# EAGLE board board (EAGLE 9.2.2)
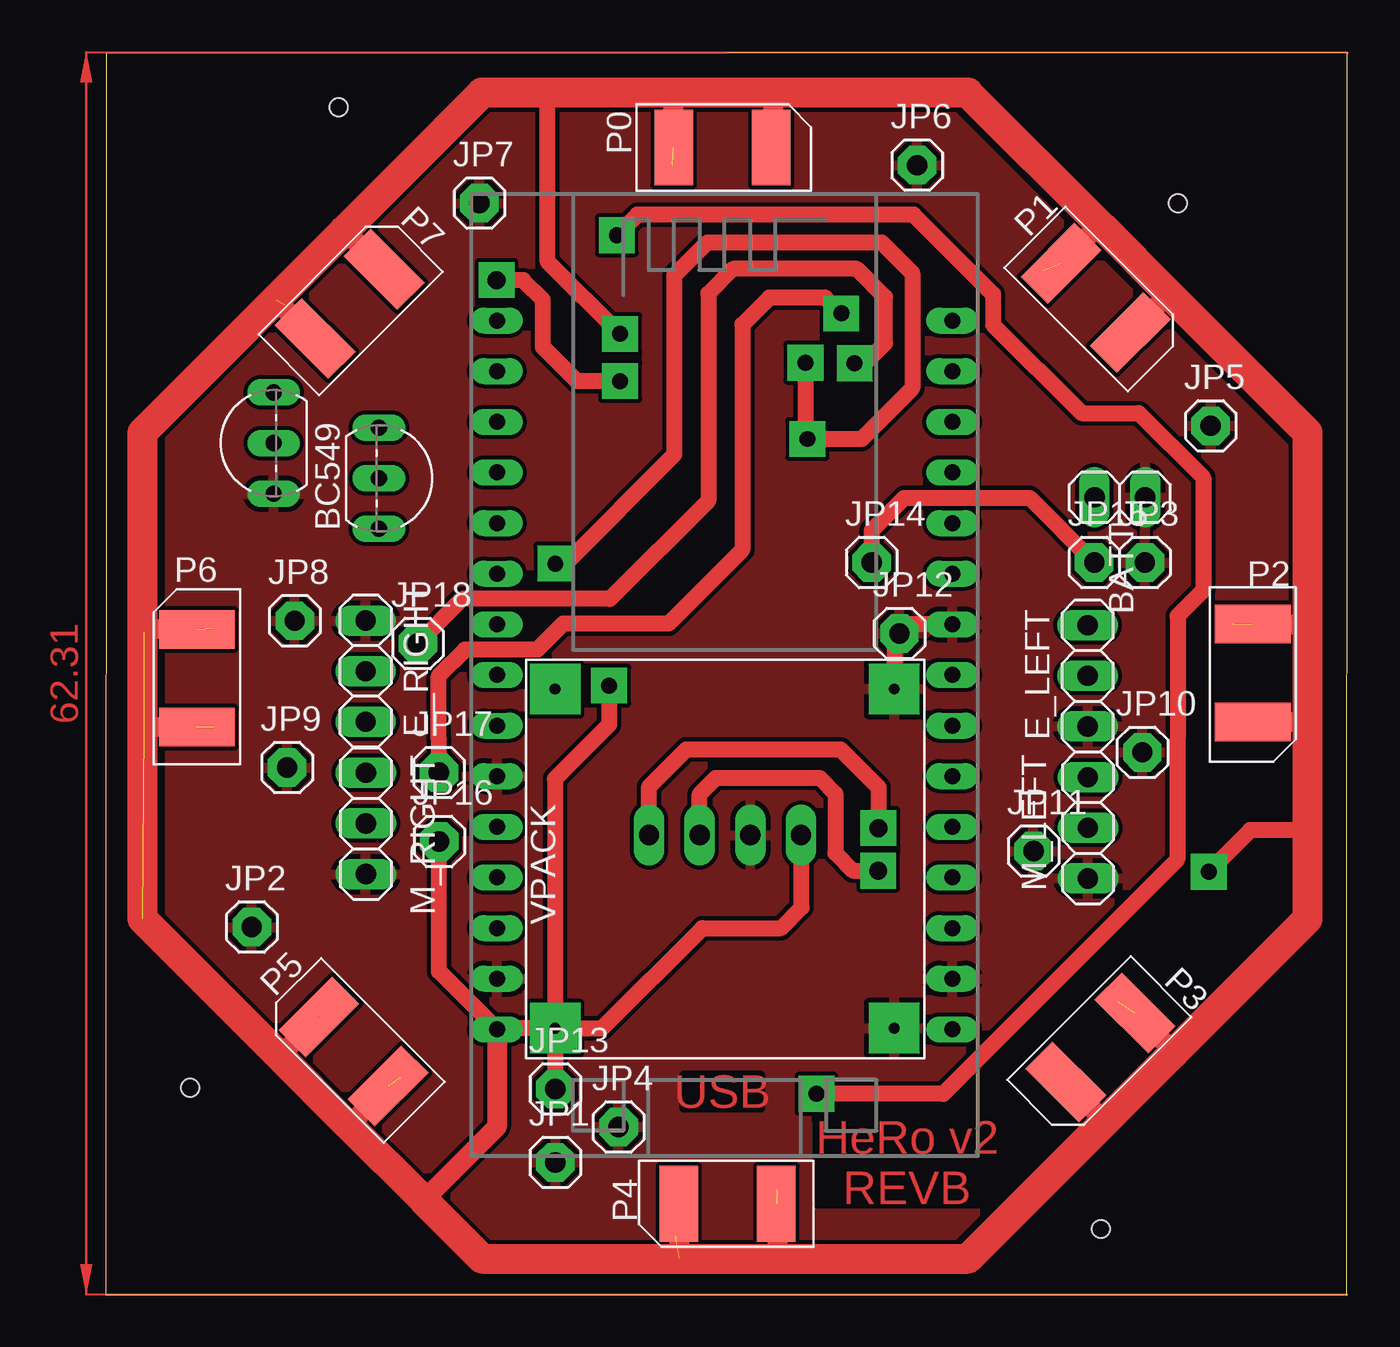
[diagram p0: board, top side]
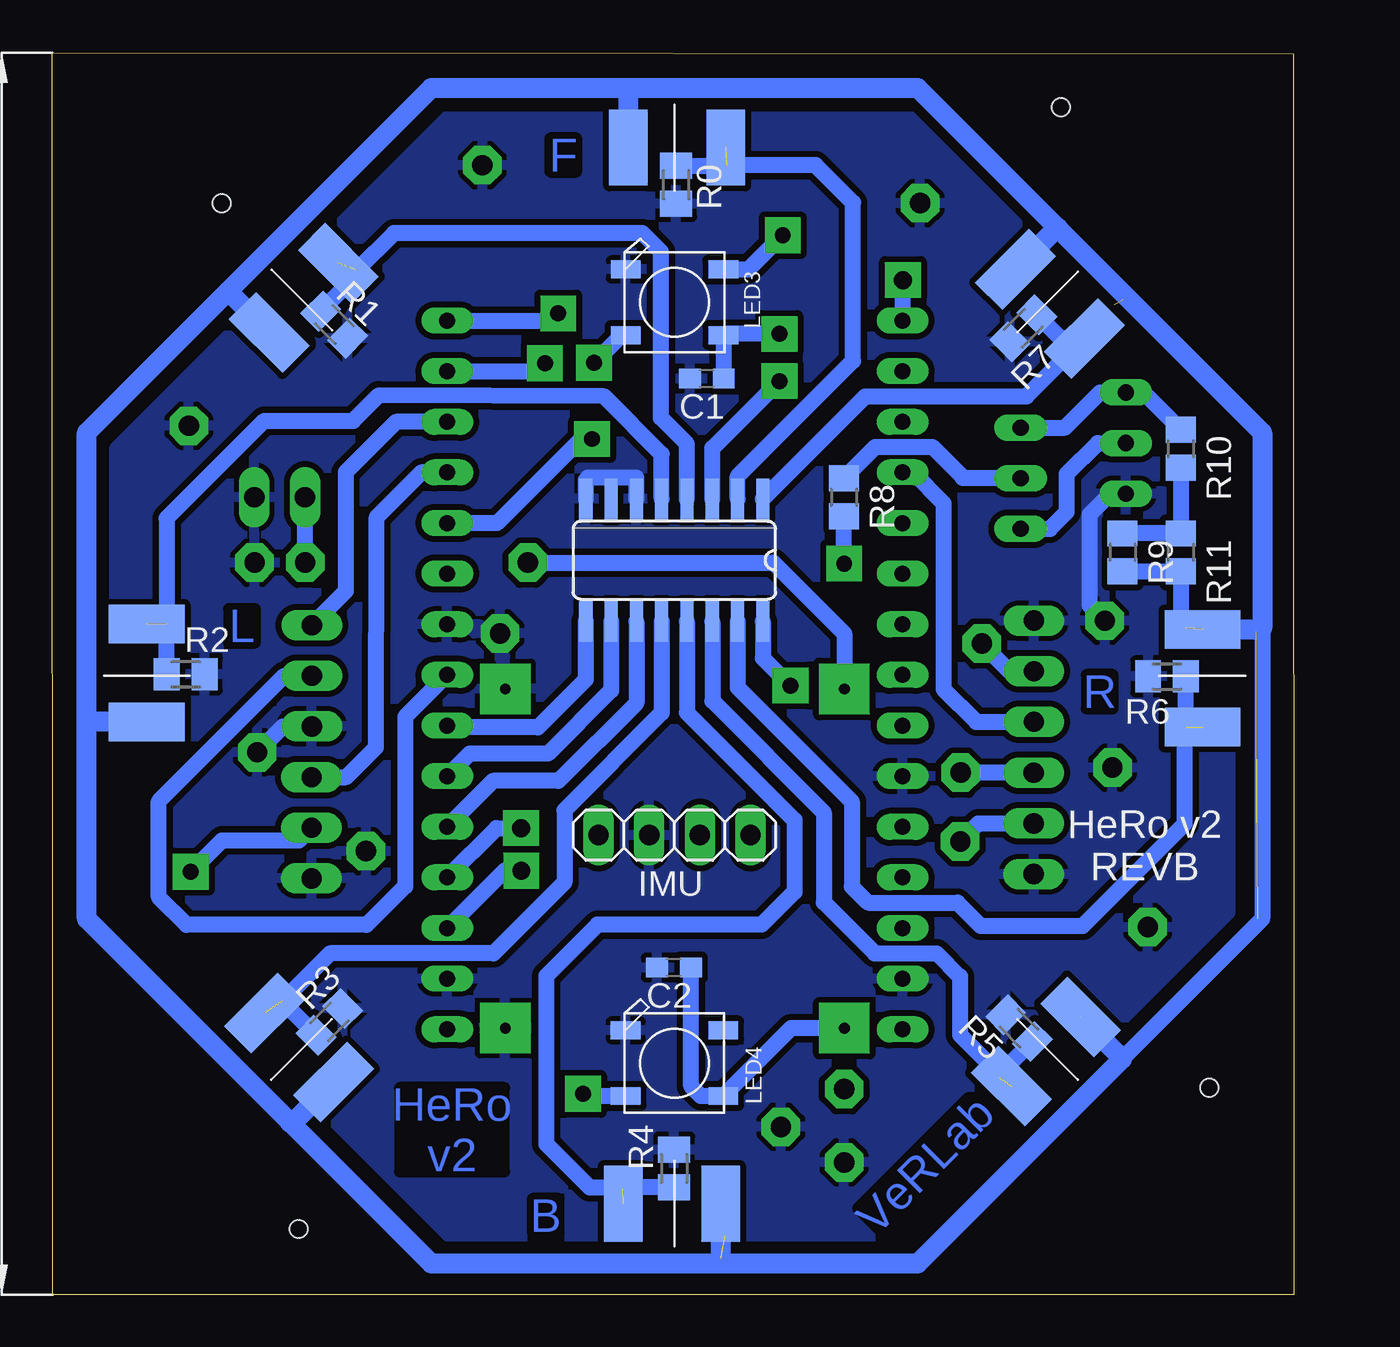
[diagram p1: board, bottom side, seen from below]

Size 62.3 x 62.33 mm. Coordinates in mm from the lower left corner, seen from the top.
Outline: 0,0 62.29,0.01 62.3,62.33 0.01,62.26 0,0
Copper layers (1*16): Top 0.035mm / dielectric 1.5mm / Bottom 0.035mm
Design rules "default": minimum track width 6mil, minimum drill 0.35mm, track to track 6mil, track to pad 6mil, pad to pad 6mil, via to via 6mil, smd to smd 6mil, copper to edge 40mil, drill to drill 6mil, minimum pad ring 10mil, minimum via ring 8mil, stop-mask expansion 4mil, vias tented up to drill 0mil, thermal gap 10mil
Net classes: 0 default: width 0.508 mm, drill 0.508 mm, clearance 0.254 mm; 1 gnd: width 2.54 mm, drill 0.508 mm, clearance 0.203 mm
Holes 0.9 mm at 53.81,54.78 11.68,59.59 4.23,10.39 49.94,3.3

## Footprints (pad centres in the part's own frame; a part is rotated, then mirrored left to right if it is on the bottom)
1X02 = drill 1.016 long: 1 -1.27,0; 2 1.27,0
TO92-CBE = drill 0.813 long: B 0,0; C -2.54,0; E 2.54,0
C0603 = smd 1.1 x 1: 1 -0.85,0; 2 0.85,0
1X03 = drill 1.016 long: 1 -2.54,0; 2 0,0; 3 2.54,0
SO16 = smd 0.66 x 2.032: 1 -4.445,-3.073; 2 -3.175,-3.073; 3 -1.905,-3.073; 4 -0.635,-3.073; 5 0.635,-3.073; 6 1.905,-3.073; 7 3.175,-3.073; 8 4.445,-3.073; 9 4.445,3.073; 10 3.175,3.073; 11 1.905,3.073; 12 0.635,3.073; 13 -0.635,3.073; 14 -1.905,3.073; 15 -3.175,3.073; 16 -4.445,3.073
1X04 = drill 1.016 long: 1 -3.81,0; 2 -1.27,0; 3 1.27,0; 4 3.81,0
1X01 = drill 1.016 pad 1.93 octagon: 1 0,0
WS2812B = smd 1.5 x 0.9: 1-VDD 2.45,-1.65; 2-DOUT 2.45,1.65; 3-GND -2.45,1.65; 4-DIN -2.45,-1.65
STEPUP = drill 0.55 pad 2.54 square: 5V -8.484,8.534; B+ 8.534,8.534; B- 8.534,-8.484; GND -8.484,-8.484
TCRT5000 = smd 1.93 x 3.81: A -2.311,0; C 2.591,0 | smd 1.93 x 3.81 bottom: E 2.591,0; K -2.311,0
M0805 = smd 1.3 x 1.6: 1 -0.95,0; 2 0.95,0
R0805 = smd 1.3 x 1.5: 1 -0.95,0; 2 0.95,0
TO92-EBC-OVAL = drill 0.813 long: B 0,-1.27; C 2.54,-1.27; E -2.54,-1.27
ESP12E_DEVKIT = drill 0.8 pad 1.27 long: 3V3@0 -11.43,-7.62; 3V3@1 11.43,5.08; 3V3@2 11.43,-17.78; AD0 -11.43,17.78; CLK -11.43,-2.54; CMD -11.43,2.54; D0 11.43,17.78; D1 11.43,15.24; D2 11.43,12.7; D3 11.43,10.16; D4 11.43,7.62; D5 11.43,0; D6 11.43,-2.54; D7 11.43,-5.08; D8 11.43,-7.62; EN -11.43,-10.16; GND@0 -11.43,-5.08; GND@1 -11.43,-15.24; GND@2 11.43,2.54; GND@3 11.43,-15.24; RST -11.43,-12.7; RSV@0 -11.43,15.24; RSV@1 -11.43,12.7; RX 11.43,-10.16; SD0 -11.43,0; SD1 -11.43,5.08; SD2 -11.43,7.62; SD3 -11.43,10.16; TX 11.43,-12.7; VIN -11.43,-17.78

## Placement (x,y rotation side)
BATT  [1X02]  50.89,40.02 180 top
BC549  [TO92-CBE]  13.7,40.97 270 top
C1  0.10 nF  [C0603]  29.45,45.97 180 bottom
C2  0.10 nF  [C0603]  31.1,16.42 180 bottom
E_LEFT  [1X03]  49.28,31.06 90 top
E_RIGHT  [1X03]  13.04,31.29 270 top
IC2  4051D  [SO16]  31.08,36.86 180 bottom
IMU  [1X04]  31.07,23.07 180 bottom
JP1  [1X01]  22.56,6.64 0 top
JP2  [1X01]  7.32,18.45 0 top
JP3  [1X01]  52.15,36.74 0 top
JP4  [1X01]  25.73,8.42 0 top
JP5  [1X01]  55.45,43.6 0 top
JP6  [1X01]  40.72,56.68 0 top
JP7  [1X01]  18.75,54.78 0 top
JP8  [1X01]  9.47,33.82 0 top
JP9  [1X01]  9.09,26.45 0 top
JP10  [1X01]  52.02,27.22 0 top
JP11  [1X01]  46.56,22.26 0 top
JP12  [1X01]  39.83,33.19 0 top
JP13  [1X01]  22.56,10.33 0 top
JP14  [1X01]  38.43,36.74 0 top
JP15  [1X01]  49.61,36.74 0 top
JP16  [1X01]  16.73,22.75 0 top
JP17  [1X01]  16.71,26.2 0 top
JP18  [1X01]  15.65,32.68 0 top
LED3  WS2812B5050  [WS2812B]  31.07,49.8 0 bottom
LED4  WS2812B5050  [WS2812B]  31.08,11.62 0 bottom
M_LEFT  [1X03]  49.29,23.43 90 top
M_RIGHT  [1X03]  13.04,23.65 90 top
OS1  [STEPUP]  31.08,21.86 90 top
P0  [TCRT5000]  31.08,57.57 180 top
P1  [TCRT5000]  49.78,49.92 135 top
P2  [TCRT5000]  57.57,31.06 90 top
P3  [TCRT5000]  49.81,12.31 45 top
P4  [TCRT5000]  31.06,4.57 0 top
P5  [TCRT5000]  12.32,12.31 315 top
P6  [TCRT5000]  4.57,31.07 270 top
P7  [TCRT5000]  12.32,49.82 225 top
R0  4k7  [M0805]  30.99,55.69 270 bottom
R1  4k7  [M0805]  48.15,48.67 315 bottom
R2  4k7  [M0805]  55.6,31.13 0 bottom
R3  4k7  [M0805]  48.39,13.7 45 bottom
R4  4k7  [M0805]  31.09,6.34 90 bottom
R5  4k7  [M0805]  13.78,13.38 135 bottom
R6  4k7  [M0805]  6.35,31.03 180 bottom
R7  4k7  [M0805]  13.56,48.5 225 bottom
R8  4k7  [R0805]  22.57,40.02 270 bottom
R9  0 R  [R0805]  8.59,37.25 270 bottom
R10  18 R  [R0805]  5.66,42.46 270 bottom
R11  NM  [R0805]  5.66,37.25 270 bottom
T5  2N2222  [TO92-EBC-OVAL]  7.15,42.74 90 top
U$1  ESP12E_DEVKIT  [ESP12E_DEVKIT]  31.05,31.1 0 top

## Library data of the parts
BATT E_LEFT E_RIGHT IMU M_LEFT M_RIGHT = pinhead
BC549 = transistor; SPICEPREFIX: J
C1 C2 JP1-JP18 LED3 LED4 R0 R1-R7 = adafruit
IC2 = 40xx
OS1 = stepup
P0 P1-P7 = tcrt5000
R8-R11 = resistor; SPICEPREFIX: R
T5 = adafruit; SPICEPREFIX: J
U$1 = ESP12E_DEVKIT

## Nets
AD0: IC2.3 U$1.AD0
B+: BATT.2 JP14.1 JP15.1 OS1.B+
E_LEFT_A: E_LEFT.3 U$1.D2
E_LEFT_B: E_LEFT.2 U$1.D5
E_RIGHT_A: E_RIGHT.3 U$1.SD3
E_RIGHT_B: E_RIGHT.2 JP18.1 U$1.D1
EM: P0.K P1.K P2.K P3.K P4.K P5.K P6.K P7.K R9.2 R11.2
EM_ENABLE: LED3.4-DIN R8.2 U$1.D4
EM_ENABLE_RES: BC549.B R8.1
GND [gnd]: BATT.1 C1.2 C2.2 E_LEFT.1 E_RIGHT.1 IC2.6 IC2.8 IMU.3 JP1.1 JP2.1 JP3.1 JP4.1 JP5.1 JP6.1 JP7.1 JP8.1 JP9.1 JP10.1 JP11.1 JP12.1 LED3.3-GND LED4.3-GND M_LEFT.1 M_RIGHT.1 OS1.B- OS1.GND R0.2 R1.2 R2.2 R3.2 R4.2 R5.2 R6.2 R7.2 T5.E U$1.GND@0 U$1.GND@1 U$1.GND@2 U$1.GND@3
M_LEFT_PWM: M_LEFT.3 U$1.D3
M_RIGHT_PWM: JP17.1 M_RIGHT.3 U$1.D0
MUX_A: IC2.11 U$1.D8
MUX_B: IC2.10 U$1.D7
MUX_C: IC2.9 U$1.D6
MUX_X0: IC2.13 P4.E R4.1
MUX_X1: IC2.14 P5.E R5.1
MUX_X2: IC2.15 P6.E R6.1
MUX_X3: IC2.12 P3.E R3.1
MUX_X4: IC2.1 P7.E R7.1
MUX_X5: IC2.5 P2.E R2.1
MUX_X6: IC2.2 P0.E R0.1
MUX_X7: IC2.4 P1.E R1.1
N$4: R9.1 R10.2 R11.1
N$6: BC549.C R10.1 T5.C
N$7: BC549.E T5.B
SCL_TX: IMU.2 U$1.TX
SDA_RX: IMU.1 U$1.RX
VCC: C1.1 C2.1 IC2.16 IMU.4 JP13.1 JP16.1 LED3.1-VDD LED4.1-VDD M_LEFT.2 M_RIGHT.2 OS1.5V P0.A P0.C P1.A P1.C P2.A P2.C P3.A P3.C P4.A P4.C P5.A P5.C P6.A P6.C P7.A P7.C U$1.VIN
VEE: IC2.7
WS_OUT: LED3.2-DOUT LED4.4-DIN

## Tracks (layer width: path | path; a pad name or v marks a point on that pad's centre or on a via)
AD0  (via drill 0.8 pad 1.8, 0.9 pad 1.8)
  Top 0.813: v25.81,45.85 23.64,45.85 21.93,47.55 21.93,49.92 20.94,50.91 v19.61,50.91
  Bottom 0.813: IC2.3 29.18,42.48 v25.81,45.85 | U$1.AD0 19.61,48.9 v19.61,50.91
B+
  Top 0.813: JP14.1 38.43,38.34 40.07,39.98 46.36,39.98 JP15.1
  Bottom 0.813: JP14.1 26.11,36.74 22.55,33.18 OS1.B+ | JP15.1 49.61,40.01 BATT.2
E_LEFT_A
  Bottom 0.508: 42.48,43.56 U$1.D2
  Bottom 0.813: U$1.D2 45.05,43.8 47.57,41.28 47.57,35.3 E_LEFT.3
E_LEFT_B
  Bottom 0.813: U$1.D5 44.59,29 44.59,20.5 46.53,18.56 55.56,18.56 56.96,19.95 56.96,24.75 50.65,31.06 E_LEFT.2
E_RIGHT_A
  Bottom 0.813: U$1.SD3 19.12,41.26 17.56,39.71 17.56,30.39 15.92,28.75 E_RIGHT.3
E_RIGHT_B  (via drill 0.8 pad 1.8)
  Top 0.813: v37.58,46.75 38.1,46.75 39.1,47.75 39.1,50.06 37.69,51.47 31.48,51.47 30.24,50.23 30.24,39.85 25.3,34.91 17.88,34.91 JP18.1
  Bottom 0.813: U$1.D1 37.99,46.34 v37.58,46.75 | E_RIGHT.2 14.26,31.29 JP18.1
EM  (2 unrouted)
  Bottom 0.508: P6.K 4.55,33.36
  Bottom 0.813: P6.K 1.63,33.38 1.57,33.44 1.57,18.86 8.6,11.84 | R9.2 R11.2 5.66,33.69 5.41,33.44
  Bottom 1: 28.71,1.56 18.87,1.56 8.6,11.84 8.6,11.85 P5.K | 28.71,1.56 43.27,1.56 50.36,8.65 | 50.36,8.65 60.57,18.86 60.57,28.69 | 60.57,28.69 60.57,43.26 53.47,50.36 | 53.47,50.36 43.27,60.56 33.38,60.56 | 33.38,60.56 18.87,60.56 11.83,53.52 | 11.83,53.52 1.57,43.26 1.57,33.44 | P6.K 1.91,33.38 1.9,33.36 | P7.K 11.89,53.52 11.83,53.52 | P1.K 53.47,50.35 53.47,50.36 | P3.K 50.2,8.65 50.36,8.65 | P4.K 28.75,1.6 28.71,1.56 | P2.K 60.52,28.75 60.57,28.69 | P0.K 33.39,60.55 33.38,60.56
EM_ENABLE  (via drill 0.8 pad 1.8)
  Top 0.508: 22.63,36.62 v22.56,36.69
  Top 0.813: v35.2,42.94 35.22,42.95 | v35.1,46.77 35.1,43.04 v35.2,42.94 | v22.56,36.69 23.06,36.69 28.54,42.16 28.54,51.14 30.2,52.81 38.93,52.81 40.48,51.26 40.48,45.49 37.92,42.94 v35.2,42.94
  Bottom 0.813: LED3.4-DIN 33.73,48.15 v35.1,46.77 | U$1.D4 39.98,38.72 35.76,42.94 v35.2,42.94 | v22.56,36.69 22.56,39.06 R8.2
EM_ENABLE_RES
  Bottom 0.813: R8.1 20.99,42.55 18.14,42.55 16.62,41.03 16.61,40.97 BC549.B
GND
  Top 0.813: U$1.GND@2 40.28,33.64 JP12.1 39.56,32.92 OS1.B-
  Bottom 0.508: C1.2 30.17,46.1
  Bottom 0.813: IC2.6 32.99,40.99 32.99,41 35.42,41 35.53,40.88 35.53,39.94 IC2.8 | JP10.1 50.72,28.52 E_LEFT.1 | JP8.1 10.24,34.58 10.24,39.15 9.2,40.2 T5.E
  pour Top: 19.38,2.93 42.52,2.93 59.2,19.61 59.2,42.49 42.52,59.17 19.23,59.17 3.19,43.14 3.19,19.12
  pour Bottom (isolate 0.305): 19.39,2.91 42.48,2.91 59.19,19.61 59.19,42.51 42.56,59.14 19.19,59.14 3.18,43.14 3.18,19.12
M_LEFT_PWM
  Bottom 0.813: U$1.D3 43.78,41.26 46.01,39.02 46.05,27.47 47.55,25.97 M_LEFT.3
M_RIGHT_PWM  (via drill 0.8 pad 1.8)
  Top 0.813: v36.91,49.24 36.11,50.04 33.3,50.04 31.94,48.68 31.94,37.39 28.23,33.68 22.95,33.68 21.64,32.37 18.02,32.37 16.7,31.05 16.7,27.86 16.71,27.85 JP17.1
  Bottom 0.813: U$1.D0 37.26,48.88 v36.91,49.24 | M_RIGHT.3 16.7,26.19 JP17.1
MUX_A
  Bottom 0.813: IC2.11 32.99,29.69 36.89,25.78 40.18,25.78 U$1.D8
MUX_B
  Bottom 0.508: U$1.D7
  Bottom 0.813: IC2.10 34.26,30.32 37.43,27.15 41.35,27.15 U$1.D7
MUX_C
  Bottom 0.813: IC2.9 35.53,30.87 37.93,28.47 42.39,28.47 U$1.D6
MUX_X0  (1 unrouted)
  Bottom 0.813: R4.1 33.59,5.39 | 33.59,5.39 33.68,5.3 | IC2.13 30.45,29.21 25.04,23.81 25.04,20.22 26.7,18.57 34.94,18.57 37.52,15.99 37.52,7.57 35.33,5.39 33.59,5.39
MUX_X1  (1 unrouted)
  Bottom 0.813: R5.1 14.76,11.06 | 14.76,11.06 14.76,10.88 | IC2.14 29.18,29.8 23.57,24.19 23.57,19.69 21.02,17.13 17.91,17.13 16.74,15.96 16.74,13.04 14.76,11.06
MUX_X2  (1 unrouted)
  Bottom 0.508: R6.1 5.44,30.99
  Bottom 0.813: IC2.15 27.91,30.47 22.17,24.74 22.17,20.49 21.36,19.67 16.87,19.67 15.71,18.52 10.58,18.52 5.46,23.63 5.46,28.43 5.41,28.49 5.41,30.91 5.46,30.96 R6.1
MUX_X3  (1 unrouted)
  Bottom 0.813: R3.1 50.77,14.73 48.37,17.13 40.16,17.13 36.6,20.69 36.6,24.31 31.72,29.19 IC2.12
MUX_X4
  Bottom 0.813: R7.1 11.71,47.98 P7.E 13.4,45.07 21.49,45.07 IC2.1
MUX_X5  (1 unrouted)
  Bottom 0.508: 56.55,33.5 56.55,33.68 56.57,33.69
  Bottom 0.813: R2.1 56.55,33.68 | IC2.5 31.72,42.18 34.61,45.07 45.92,45.13 47.19,43.85 51.66,43.85 56.57,38.95 56.57,33.69
MUX_X6  (1 unrouted)
  Bottom 0.508: 28.45,56.68 28.49,56.64
  Bottom 0.813: R0.1 28.49,56.64 | IC2.2 27.91,41.07 23.32,45.65 22.11,46.86 22.11,54.8 23.99,56.68 28.45,56.68
MUX_X7  (1 unrouted)
  Bottom 0.508: 47.02,51.4 47.02,51.15
  Bottom 0.813: R1.1 47.02,51.15 | IC2.4 30.45,42.69 31.75,43.99 31.75,52.34 32.68,53.26 45.15,53.26 47.02,51.4
N$4
  Bottom 0.813: R10.2 R11.1 R9.1
N$6
  Bottom 0.813: T5.C 7.85,45.28 | 7.79,45.28 T5.C | T5.C 7.53,45.28 R10.1 | BC549.C 11.47,43.51 9.7,45.28 T5.C
N$7
  Bottom 0.813: BC549.E 12.23,38.43 11.38,39.28 11.38,41.19 9.83,42.74 T5.B
SCL_TX  (via drill 0.9 pad 1.8)
  Top 0.813: IMU.2 29.8,25.11 30.62,25.93 35.83,25.93 36.61,25.15 36.61,22.17 37.5,21.29 v38.76,21.29
  Bottom 0.813: v38.76,21.29 39.6,21.29 U$1.TX
SDA_RX  (via drill 0.9 pad 1.8)
  Top 0.813: IMU.1 27.26,25.49 29.13,27.37 36.87,27.37 38.77,25.46 v38.77,23.42
  Bottom 0.813: U$1.RX 40.01,23.42 v38.77,23.42
VCC  (via drill 0.8 pad 1.8)  (6 unrouted)
  Top 0.508: P5.C 14.16,10.26 | P4.C 33.65,4.57 | P4.A 28.76,4.57 | P2.C 57.7,33.77 | 57.64,28.82 P2.A | 8.99,49.49 8.99,49.68 | P6.A 4.5,33.31 | 4.4,28.31 P6.C | 28.75,3.14 28.58,2.96 | 60.31,38.67 60.32,38.66 | 19.68,13.38 U$1.VIN | 16.48,57.82 16.38,57.82 | 24.63,60.26 24.57,60.31
  Top 0.813: OS1.5V 19.68,13.38 | U$1.VIN 16.71,16.23 JP16.1 | OS1.5V 24.91,13.38 29.93,18.4 33.87,18.4 34.91,19.44 34.91,23.03 IMU.4 | v25.26,30.57 25.26,28.61 22.53,25.88 22.53,13.39 OS1.5V | v55.35,21.23 57.43,23.32 60.27,23.32 60.32,23.37 | v25.81,48.21 22.17,51.84 22.17,60.31 | JP13.1 22.56,13.37 OS1.5V
  Top 1: P6.A 1.94,33.38 1.9,33.33 1.9,33.26 | P6.C 1.91,28.48 1.9,28.49 | P5.A 8.84,12.09 8.6,12.09 | P5.C 12.2,8.52 12.16,8.52 | P3.A 50.12,8.73 50.12,8.66 | P3.C 53.6,12.18 53.6,12.14 | 57.62,28.79 P2.A 60.16,28.75 60.32,28.59 | 60.16,33.82 60.16,33.66 60.15,33.65 P2.C 60.28,33.65 60.32,33.6 | P1.A 53.35,50.22 53.36,50.22 | P1.C 49.77,53.58 50.01,53.58 | P0.A 33.5,57.68 33.5,60.31 | P0.C 28.49,60.13 28.68,60.31 | P7.A 12.02,53.39 11.95,53.39 | P7.C 8.57,49.9 8.57,50.01 | U$1.VIN 19.62,8.43 15.94,4.75 | 28.68,4.49 P4.A 28.75,1.84 28.78,1.81 | P4.C 33.69,4.53 33.69,1.81
  Top 1.5: 18.87,1.81 28.78,1.81 33.69,1.81 43.27,1.81 50.12,8.66 53.6,12.14 60.32,18.86 60.32,23.37 60.32,28.59 60.32,33.6 60.32,38.66 60.32,43.26 53.36,50.22 50.01,53.58 43.27,60.31 33.5,60.31 28.68,60.31 24.57,60.31 22.17,60.31 18.87,60.31 16.38,57.82 11.95,53.39 8.57,50.01 1.82,43.26 1.82,18.86 8.6,12.09 12.16,8.52 15.94,4.75 18.87,1.81
  Bottom 0.813: OS1.5V 25.22,13.38 LED4.1-VDD 29.75,9.97 30.24,10.47 30.24,16.41 C2.1 | IC2.16 26.64,31.95 v25.26,30.57 | v25.81,48.21 28.56,48.21 LED3.1-VDD 28.6,48.13 C1.1 | M_LEFT.2 49.92,22.8 53.78,22.8 v55.35,21.23 | JP16.1 15.82,23.65 M_RIGHT.2
WS_OUT  (via drill 0.8 pad 1.8)
  Top 0.508: v25.64,53.16 25.67,53.14
  Top 0.813: v25.64,53.16 26.67,54.19 40.54,54.19 44.53,50.2 44.53,48.68 48.97,44.23 51.84,44.23 55.07,41.01 55.07,35.34 53.79,34.07 53.77,21.83 42.02,10.08 v35.66,10.08
  Bottom 0.508: 33.64,10.08 LED4.4-DIN
  Bottom 0.813: LED4.4-DIN 35.55,9.97 v35.66,10.08 | LED3.2-DOUT 27.36,51.45 v25.64,53.16
(copper drawn outside any net)
  shapes: Top area x1

## Text on the board
Top: USB | HeRo v2 / REVB
Bottom: F | L | R | HeRo / v2 | VeRLab | B
bPlace: HeRo v2 / REVB